# Altium PCB nrf52_linkit.PcbDoc
Units mm, origin at the board's own origin, x right, y up, seen from the top; angles counter-clockwise.
Board outline 51.36 x 26.51 mm, 2 copper layers (Top Layer, Bottom Layer); 24 components, 40 nets, 135 pads, 36 vias.
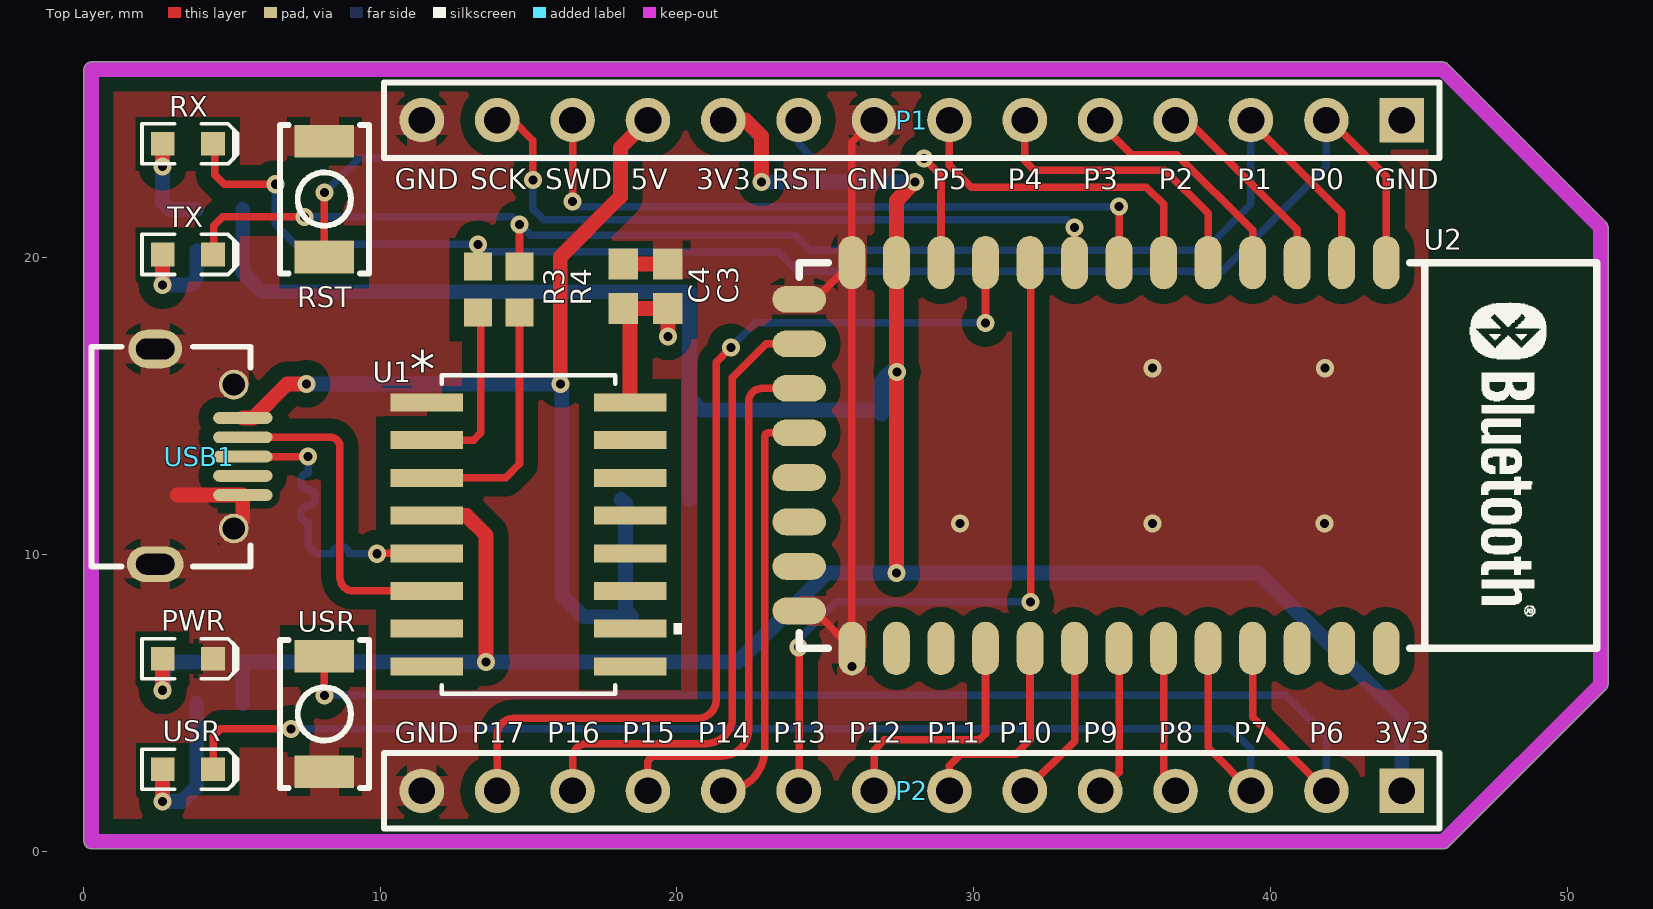
[diagram p0: Top Layer view]
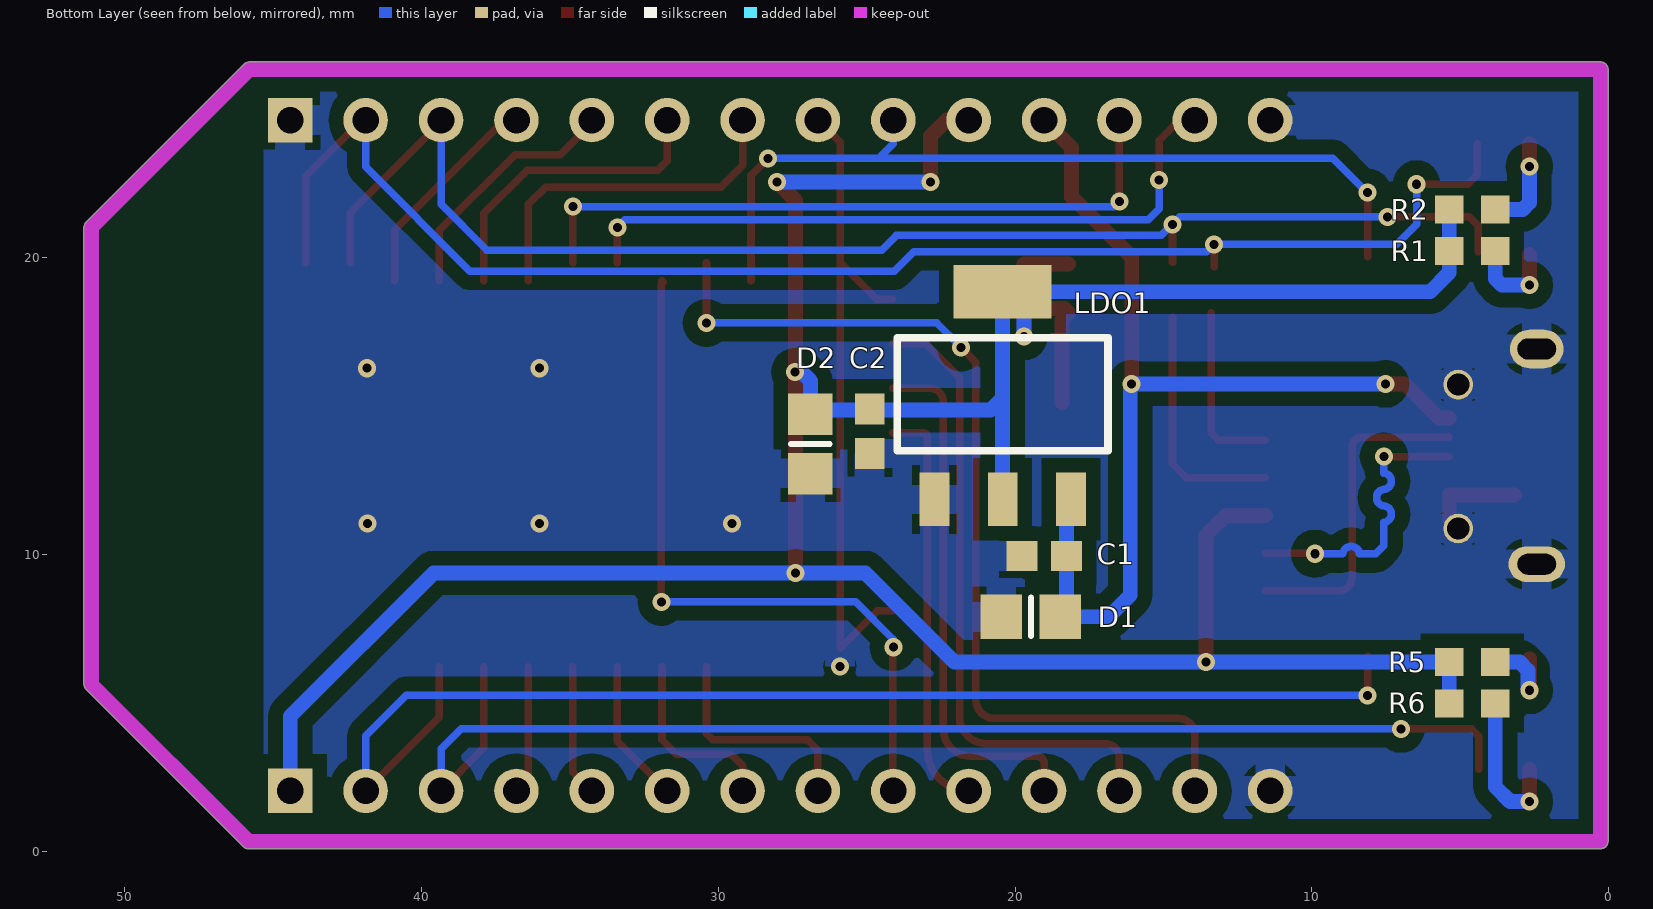
[diagram p1: Bottom Layer view, seen from below]
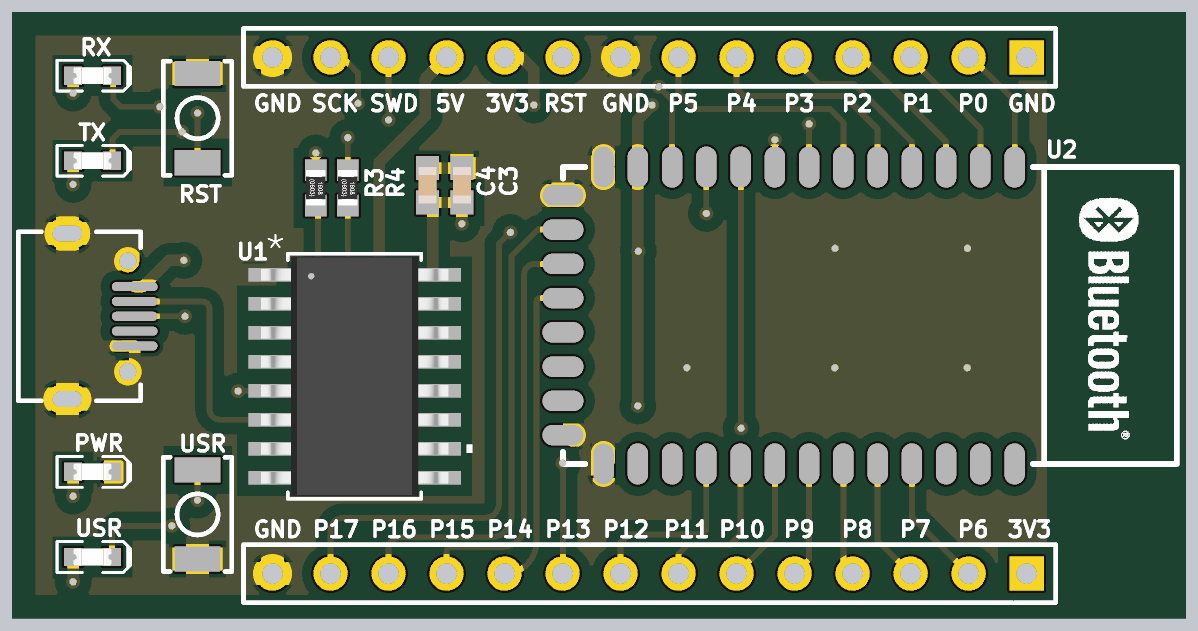
[diagram p2: 3D render of the assembled board from above, using the file's embedded part models]
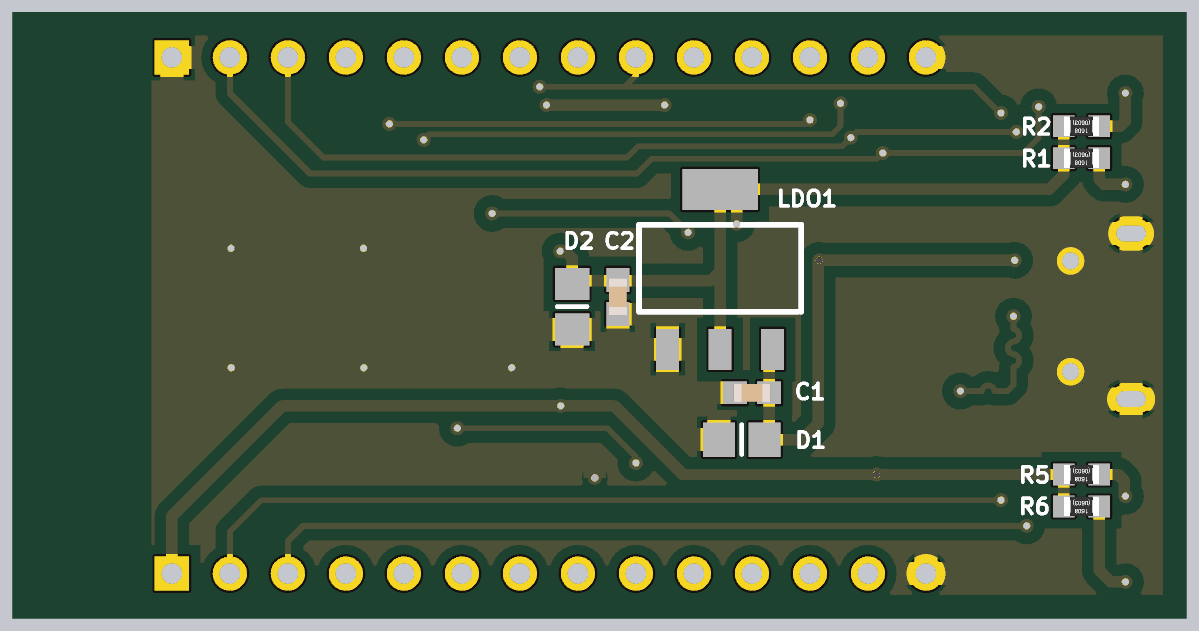
[diagram p3: 3D render of the assembled board from below, using the file's embedded part models]

## Layer stack, top to bottom
Top Solder: solder mask 0.0102, Solder Resist, Dk 3.5
Top Layer: signal copper 0.0356
Dielectric 1: dielectric 0.32, FR-4, Dk 4.8
Bottom Layer: signal copper 0.0356
Bottom Solder: solder mask 0.0102, Solder Resist, Dk 3.5

## Board outline
0.273,0.085 cw(c0.273,0.335) 0.023,0.335 0.023,26.347 cw(c0.273,26.347) 0.273,26.597 45.803,26.597 cw(c45.803,26.347) 45.98,26.524 cw(c45.803,26.347) 45.98,26.524 51.309,21.195 ccw(c51.132,21.018) 51.309,21.196 51.309,21.195 cw(c51.132,21.018) 51.382,21.018 51.382,5.632 cw(c51.132,5.632) 51.309,5.455 cw(c51.132,5.632) 51.309,5.454 51.309,5.455 46.012,0.158 ccw(c45.835,0.335) 46.012,0.158 cw(c45.835,0.335) 45.835,0.085

## Design rules (kind name [scope] priority, off if disabled: settings)
Clearance Clearance_1 [(InNet('GND') AND InPolygon)] p1: gap=0.5
Clearance [All] p2: gap=0.127
PolygonConnect [InNet('GND') vs InNet('GND')] p1: connectstyle=Relief reliefconductorwidth=1 reliefentries=4 polygonreliefangle="90 Angle" airgapwidth=0.254
RoutingVias [All] p1: holewidth=0.711 width=1.27 viastyle="Through Hole" minholewidth=0.711 minwidth=1.27 maxholewidth=0.711 maxwidth=1.27
SolderMaskExpansion [All] p1: expansion=0.102
Width [All] p1: maxlimit=1 minlimit=0.254 preferedwidth=0.5
30 further rules are at their usual default settings.

## Components (designator, comment, footprint, x,y, rotation, side; value= is the part's Value field where it differs from the comment)
C1 "Cap Semi" C0603 19.025,9.95 r180 bottom
C2 "Cap Semi" C0603 24.9,14.15 r90 bottom
C3 "Cap Semi" C0603 19.7,19.035 r270 top
C4 "Cap Semi" C0603 18.2,19.035 r270 top
D1 "Diode" 6-0805_M 19.475,7.9 r180 bottom
D2 "Diode" 6-0805_M 26.9,13.725 r90 bottom
LDO1 "AMS1117" SOT-223 22.723,11.855 r0 bottom
P1 "Header 14" HDR1X14 44.428,24.635 r180 top
P2 "Header 14" HDR1X14 44.428,2.035 r180 top
PWR "LED" 0603 3.525,6.488 r0 top
R1 "Resistors SMD" R0603-M 4.6,20.225 r0 bottom
R2 "Resistors SMD" R0603-M 4.6,21.625 r0 bottom
R3 "Resistors SMD" R0603-M 13.3,18.925 r270 top
R4 "Resistors SMD" R0603-M 14.7,18.925 r270 top
R5 "Resistors SMD" R0603-M 4.6,6.375 r0 bottom
R6 "Resistors SMD" R0603-M 4.6,4.975 r0 bottom
RST "SW-PB" SWITCH_SMD_4x3_DHT-1185 8.125,21.975 r90 top
RX "LED" 0603 3.525,23.838 r0 top
TX "LED" 0603 3.525,20.112 r0 top
U1 "CH340C" SOP16-M 15,10.675 r0 top
U2 "nRF52832" BlueTooth_34_SMD 36.935,13.335 r270 top
USB1 "USB-MICRO" USB-MICRO 2.425,13.3 r270 top
USR "SW-PB" SWITCH_SMD_4x3_DHT-1185 8.125,4.625 r270 top (schematic designator SW1)
USR "LED" 0603 3.525,2.762 r0 top

## Footprints (in the part's own frame and the unit in brackets; to place one, negate y for a bottom-side part, rotate by r counter-clockwise, add the part's x,y. Pads: shape width x height; smd on the part's side, far side on the other; paste and mask are expansions set on the pad)
6-0805_M [mm] "Chip Resistor, Body 2.0x1.2mm, IPC Low Density"
  rect 1.4x1.5 smd: 1(-1,0) 2(1,0)
  silkscreen extent 0,-0.65 0,0.65, body extent -1.07,-0.7 1.07,0.7, height 0.7
0603 [mm]
  round 0.254 on Mech15: 0(0,0)
  rect 0.8x0.8 smd: 1(-0.85,0) 2(0.85,0)
  Top Layer pour cut-out: -0.5,0.5 0.5,0.5 0.5,-0.5 -0.5,-0.5
  silkscreen extent -1.55,-0.67 1.68,0.67, body extent -0.83,-0.36 0.83,0.36, height 0.68
BlueTooth_34_SMD [mm]
  oval 1.8x0.9 smd: 1(-6.5,6.968) 2(-6.5,5.468) 3(-6.5,3.968) 4(-6.5,2.468) 5(-6.5,0.968) 6(-6.5,-0.532) 7(-6.5,-2.032) 8(-6.5,-3.532) 9(-6.5,-5.032) 10(-6.5,-6.532) 11(-6.5,-8.032) 12(-6.5,-9.532) 13(-6.5,-11.032) 22(6.5,-11.032) 23(6.5,-9.532) 24(6.5,-8.032) 25(6.5,-6.532) 26(6.5,-5.032) 27(6.5,-3.532) 28(6.5,-2.032) 29(6.5,-0.532) 30(6.5,0.968) 31(6.5,2.468) 32(6.5,3.968) 33(6.5,5.468) 34(6.5,6.968)
  oval 0.9x1.8 smd: 14(-5.262,-12.81) 15(-3.762,-12.81) 16(-2.262,-12.81) 17(-0.762,-12.81) 18(0.738,-12.81) 19(2.238,-12.81) 20(3.738,-12.81) 21(5.238,-12.81)
  silkscreen extent -6.5,-12.81 6.5,14.07
C0603 [mm] "Chip Capacitor, EIA 0603, IPC-7351 Level B Medium Density"
  round 0.254 on Mech15: 0(0,0)
  rect 1.05x1 smd: 1(-0.75,0) 2(0.75,0)
  Top Layer pour cut-out: -0.2,0.5 0.2,0.5 0.2,-0.5 -0.2,-0.5
  body extent -0.8,-0.4 0.8,0.4, height 0.78
HDR1X14 [mm] "Connector; Header; 14 Position"
  rect 1.5x1.5 hole 0.9: 1(0,0)
  round 1.5 hole 0.9: 2(2.54,0) 3(5.08,0) 4(7.62,0) 5(10.16,0) 6(12.7,0) 7(15.24,0) 8(17.78,0) 9(20.32,0) 10(22.86,0) 11(25.4,0) 12(27.94,0) 13(30.48,0) 14(33.02,0)
  silkscreen extent -1.27,-1.27 34.29,1.27
R0603-M [mm] "Chip Resistor, 2-Leads, Body 1.68x0.88mm, IPC Medium Density"
  rect 0.95x0.95 smd: 1(-0.775,0) 2(0.775,0)
  Top Layer pour cut-out: -0.254,0.675 0.254,0.675 0.254,-0.675 -0.254,-0.675
  body extent -0.77,-0.42 0.78,0.43, height 0.44
SOP16-M [mm]
  rect 2.448x0.608 smd paste+0 mask+0: 1(-3.428,4.445) 2(-3.428,3.175) 3(-3.428,1.905) 4(-3.428,0.635) 5(-3.428,-0.635) 6(-3.428,-1.905) 7(-3.428,-3.175) 8(-3.428,-4.445) 9(3.428,-4.445) 10(3.428,-3.175) 11(3.428,-1.905) 12(3.428,-0.635) 13(3.428,0.635) 14(3.428,1.905) 15(3.428,3.175) 16(3.428,4.445)
  silkscreen extent -2.92,-5.37 5.16,5.37, body extent -4.1,-5.24 4.1,5.25, height 2.01
SOT-223 [mm]
  rect 3.3x1.8 smd: 0(-2.3,-7)
  rect 1x1.8 smd: 1(0,0) 2(-2.3,0) 3(-4.6,0)
  silkscreen extent -5.85,-5.45 1.25,-1.64
SWITCH_SMD_4x3_DHT-1185 [mm]
  rect 1.1x2 smd: 1(-1.95,0) 2(1.95,0)
  silkscreen extent -2.5,-1.5 2.5,1.5
USB-MICRO [mm] "USB方孔"
  oval 1.3x1.8 hole 0.7 slot 1.3 at 90 deg: 0(-3.625,0)
  round 1 hole 0.75: 0(-2.425,2.65) 0(2.425,2.65)
  oval 1.2x1.9 hole 0.7 slot 1.3 at 90 deg: 0(3.625,0)
  oval 0.4x2 smd: 1(-1.3,2.95) 2(-0.65,2.95) 3(0,2.95) 4(0.65,2.95) 5(1.3,2.95)
  silkscreen extent -3.7,-2.15 3.7,3.21

## Part data
C1 C2 C3 C4: "Capacitor (Semiconductor SIM Model)"
D1 D2: "Default Diode"
P1 P2: "Header, 14-Pin"
PWR RX TX USR: "Typical INFRARED GaAs LED"
R1 R2 R3 R4 R5 R6: "Resistor"
RST USR: "按鈕開關"
U1: "No Description Available"

## Via types
v1: diameter 0.61, hole 0.305, Top Layer to Bottom Layer, tented both sides, 36 vias

## Nets (pads, with @x,y where several pads share a name; then routed paths per layer and width w, separated by ;. In a path a pad name is that pad's centre, name@x,y a point inside that pad or via, vN(x,y) a via of type N, cw(c..) or ccw(c..) an arc to the next point about the centre after c; other vN are vias at no path point)
3V3: C2.2 C3.2 C4.2 D2.2 LDO1.0 LDO1.2 P1.10 P2.1 R1.2 R2.2 R5.2 R6.2 U1.4 U1.16 U2.12 | length 114.5
  Top Layer w0.5: U1.4 12.915,11.31 13.575,10.65 v1(13.575,6.375) ; U1.16 18.428,17.917 18.2,18.145 18.34,18.285 C3.2 v1(19.7,17.35) ; P1.10 22.315,24.635 22.85,24.1 v1(22.85,22.55) ; v1@27.403,9.375 U2.12 27.403,21.928 v1(28.025,22.55)
  Bottom Layer w0.5: R6.2 R5.2 v1@13.4,6.375 ; R2.2 5.375,19.5 6.02,18.855 LDO1.0@20.33,18.855 ; v1(13.575,6.375) 22.05,6.375 25.05,9.375 v1(27.4,9.375) 39.6,9.375 44.428,4.547 P2.1 ; v1(19.7,17.35) 19.7,18.225 LDO1.0@20.33,18.855 ; LDO1.2 20.423,15.275 ; v1(22.85,22.55) v1(28.025,22.55) ; D2.2 D2.2@26.9,14.865 ; v1(27.425,16.15) 27.2,16.15 26.9,15.85 D2.2@26.9,14.865 ; LDO1.0@20.33,18.855 LDO1.0 20.423,15.275 ; 20.423,15.275 20.833,14.865 D2.2@26.9,14.865
BGT24_EN: P2.5 U2.28 | length 4.5
  Top Layer w0.254: P2.5 34.903,2.67 U2.28@34.903,6.223
D+: U1.5 USB1.3 | length 10.4
  Top Layer w0.254: USB1.3 v1(7.575,13.3) ; v1(9.9,10.025) 9.915,10.04 U1.5
  Bottom Layer w0.254: v1(7.575,13.3) 7.575,12.746 ccw(c7.603,12.469) 7.575,12.192 cw(c7.547,11.915) 7.575,11.638 ccw(c7.603,11.361) 7.575,11.084 7.575,10.53 7.575,10.3 7.85,10.025 8.404,10.025 cw(c8.681,9.997) 8.958,10.025 9.512,10.025 v1(9.9,10.025)
D-: U1.6 USB1.2 | length 11.1
  Top Layer w0.254: USB1.2@5.4,13.975 USB1.2 8.325,13.95 cw(c8.325,13.625) 8.65,13.625 8.65,9.225 ccw(c9.105,9.225) 9.105,8.77 U1.6
EN: P2.4 U2.29 | length 4.4
  Top Layer w0.254: U2.29@36.403,6.223 36.403,2.44 P2.4
GND: C1.1 C2.1 C3.1 C4.1 D1.1 D2.1 LDO1.1 P1.1 P1.8 P1.14 P2.14 PWR.2 RST.2 U1.1 U2.13 U2.14 U2.21 U2.22 USB1.0 USB1.5 USR.2@8.125,2.675 | length 27.6
  Top Layer w0.254: U2.21 24.641,8.097 U2.22 U2.13 ; U2.14 24.665,18.597 U2.13 ; P1.8 25.903,23.89 U2.13
  Top Layer w0.5: 3.175,12 USB1.5 5.375,11.175 USB1.0@5.075,10.875 ; C4.1 C3.1
  other v1: 25.908,6.225 29.55,11.05 36.025,11.05 41.825,11.05 36.037,16.276 41.837,16.276
I_CW: P2.10 U2.17 | length 14
  Top Layer w0.254: P2.10 ccw(c21.568,3.435) 22.968,3.435 22.968,13.968 cw(c23.097,13.968) 23.097,14.097 U2.17
I_HIGHGAIN: P2.13 U2.10 | length 33
  Top Layer w0.254: P2.13 13.948,3.923 cw(c14.5,3.923) 14.5,4.475 20.7,4.475 ccw(c20.7,5.1) 21.325,5.1 21.325,16.475 v1(21.825,16.975) ; v1(30.403,17.803) U2.10
  Bottom Layer w0.254: v1(21.825,16.975) 22.653,17.803 v1(30.403,17.803)
MUXOUT: P1.4 U2.3 | length 7.2
  Top Layer w0.254: P1.4@37.012,24.839 40.903,20.947 U2.3@40.903,19.223
NetPWR_1: PWR.1 R5.1 | length 3
  Top Layer w0.5: v1(2.675,5.425) PWR.1
  Bottom Layer w0.5: v1(2.675,5.425) 2.725,5.475 2.725,6.1 3,6.375 R5.1
NetR1_1: R1.1 TX.1 | length 3.2
  Top Layer w0.5: v1(2.675,19.075) TX.1
  Bottom Layer w0.5: v1@2.7,19.075 3.601,19.075 3.825,19.299 R1.1
NetR2_1: R2.1 RX.1 | length 3.2
  Top Layer w0.5: v1(2.675,23.075) RX.1
  Bottom Layer w0.5: v1(2.675,23.075) 2.675,21.85 2.9,21.625 R2.1
NetR6_1: R6.1 USR.1@2.675,2.762 | length 5.2
  Top Layer w0.5: v1(2.675,1.675) USR.1@2.675,2.762
  Bottom Layer w0.5: v1(2.675,1.675) 3.325,1.675 3.825,2.175 R6.1
P0: P1.2 R3.1 RX.2 U2.1 | length 50.2
  Top Layer w0.254: RX.2@4.434,23.838 4.434,22.791 4.75,22.475 v1(6.475,22.475) ; R3.1 v1(13.3,20.45) ; P1.2@41.838,24.584 42.066,24.584 43.903,22.747 U2.1
  Bottom Layer w0.254: v1(6.475,22.475) 6.475,21.125 7.15,20.45 v1(13.3,20.45) 13.55,20.2 23.425,20.2 24.075,19.55 38.375,19.55 41.888,23.063 P1.2
P0.06: U2.18
P0.07: U2.19
P0.08: U2.20
P0.09: U2.23
P0.10: U2.24
P0.18: U2.32
P0.19: U2.33
P0.20: U2.34
P1: P1.3 R4.1 TX.2 U2.2 | length 47.3
  Top Layer w0.254: TX.2@4.4,20.2 4.4,21.075 4.7,21.375 v1(7.45,21.375) ; R4.1@14.7,19.85 v1(14.7,21.125) ; P1.3@39.424,24.712 39.424,24.501 42.403,21.522 U2.2
  Bottom Layer w0.254: v1(7.45,21.375) 14.45,21.375 v1(14.7,21.125) 15.075,20.75 24,20.75 24.5,20.25 37.8,20.25 39.348,21.798 P1.3
P3: P1.5 U2.4 | length 8.4
  Top Layer w0.254: P1.5@34.218,24.585 35.327,23.475 36.851,23.475 39.403,20.923 U2.4@39.403,19.223
P4: P1.6 U2.5 | length 10.6
  Top Layer w0.254: P1.6 31.728,23.264 32.042,22.95 36.45,22.95 37.903,21.497 U2.5@37.903,19.223
P5: P1.7 U2.6 | length 11.9
  Top Layer w0.254: P1.7 29.188,23.112 29.925,22.375 35.825,22.375 36.403,21.797 U2.6@36.403,19.223
P6: P2.2 U2.31 USR.1@8.125,6.575 | length 42.7
  Top Layer w0.254: v1(8.125,5.25) USR.1@8.125,6.575 ; U2.31@39.403,6.223 39.403,4.52 P2.2
  Bottom Layer w0.254: v1(8.125,5.25) 40.525,5.25 41.888,3.887 P2.2
P7: P2.3 U2.30 USR.2@4.375,2.762 | length 42.7
  Top Layer w0.254: USR.2@4.375,2.762 4.375,3.875 4.625,4.125 v1(7,4.125) ; U2.30@37.903,6.223 37.903,3.48 P2.3
  Bottom Layer w0.254: v1(7,4.125) 38.675,4.125 39.348,3.452 P2.3
P10: P2.6 U2.27 | length 4.9
  Top Layer w0.254: P2.6 33.403,3.71 U2.27@33.403,6.223
P11: P2.7 U2.26 | length 6.4
  Top Layer w0.254: P2.7 29.188,2.888 29.575,3.275 31.425,3.275 31.903,3.753 U2.26@31.903,6.223
P12: P2.8 U2.25 | length 7.6
  Top Layer w0.254: P2.8 26.648,3.398 27,3.75 30.2,3.75 30.403,3.953 U2.25@30.403,6.223
P13: P2.9 U2.9 | length 24.3
  Top Layer w0.254: P2.9@24.125,2.035 v1@24.125,6.875 ; U2.9@31.903,19.223 31.855,19.175 31.93,19.1 31.925,19.094 v1(31.925,8.4)
  Bottom Layer w0.254: v1(24.108,6.875) 24.108,7.135 25.373,8.4 v1(31.925,8.4)
P15: P2.11 U2.16 | length 18
  Top Layer w0.254: P2.11 19.028,2.978 cw(c19.25,2.978) 19.25,3.2 21.5,3.2 ccw(c21.5,4.125) 22.425,4.125 22.425,15.15 cw(c22.872,15.15) 22.872,15.597 U2.16
P16: P2.12 U2.15 | length 21.4
  Top Layer w0.254: P2.12 16.488,3.138 cw(c16.975,3.138) 16.975,3.625 20.975,3.625 ccw(c20.975,4.525) 21.875,4.525 21.875,15.951 23.021,17.097 U2.15
RST: P1.9 RST.1 U2.11 | length 28.7
  Top Layer w0.254: RST.1 v1(8.125,22.2) ; v1(28.325,23.35) 28.903,22.772 U2.11@28.903,19.223
  Bottom Layer w0.254: v1@8.138,22.187 9.3,23.35 24.6,23.35 ; P1.9 24.108,23.842 24.6,23.35 ; v1(28.325,23.35) 24.6,23.35
RX_CH340: R4.2 U1.3 | length 8.3
  Top Layer w0.254: U1.3 14.23,12.58 14.7,13.05 R4.2@14.7,18
SW_DCLK: P1.13 U2.8 | length 23.5
  Top Layer w0.254: P1.13 14.465,24.635 15.15,23.95 v1(15.15,22.625) ; U2.8 v1(33.403,21.025)
  Bottom Layer w0.254: v1(15.15,22.625) 15.15,21.65 15.525,21.275 33.153,21.275 v1(33.403,21.025)
SW_DIO: P1.12 U2.7 | length 23.1
  Top Layer w0.254: v1(16.488,21.9) P1.12 ; U2.7 v1(34.903,21.725)
  Bottom Layer w0.254: v1(16.488,21.9) 16.663,21.725 v1(34.903,21.725)
TX_CH340: R3.2 U1.2 | length 6
  Top Layer w0.254: U1.2 13.15,13.85 13.4,14.1 R3.2@13.4,18.15
V_USB: C1.2 D1.2 LDO1.3 P1.11 USB1.1 | length 35.2
  Top Layer w0.5: USB1.1 5.725,14.6 6.875,15.75 v1(7.525,15.75) ; v1(16.075,15.75) 16.075,20.025 18.1,22.05 18.1,23.707 P1.11
  Bottom Layer w0.5: v1(7.525,15.75) 16.125,15.75 16.125,8.625 16.85,7.9 D1.2 18.275,8.1 C1.2 18.275,11.703 LDO1.3
pads on no net: C1.0 C2.0 C3.0 C4.0 PWR.0 RX.0 TX.0 U1.7 U1.8 U1.9 U1.10 U1.11 U1.12 U1.13 U1.14 U1.15 USB1.4 USR.0

## Polygon pours and split planes (outlines as drawn)
GND on Top Layer "Bottom Layer-No Net" (solid, remove dead copper, pour order 2): -3.5,30.612 -3.5,-3.175 45.325,-3.175 45.325,30.529
GND on Bottom Layer "Bottom Layer-No Net" (solid, remove dead copper, pour order 0): -9.85,30.28 -9.85,0.45 45.325,0.45 45.325,30.186

## Keep-outs
Keep-Out Layer:
  lines w0.5: 0.273,0.335 0.273,26.347 45.803,26.347 51.132,21.018 51.132,5.632 45.835,0.335 0.273,0.335

## Other copper
Top Layer:
  pour cut-out: 45.525,5.877 50.958,5.877 50.993,5.842 50.993,20.828 45.532,20.828
Bottom Layer:
  pour cut-out: 45.525,5.877 50.958,5.877 50.993,5.842 50.993,20.828 45.532,20.828

## Silkscreen, mask and mechanical layers (free items; w line width, h text height)
Top Overlay:
  text "GND" at 10.494,22.3 h0.69
  text "SCK" at 13.034,22.3 h0.69
  text "SWD" at 15.574,22.3 h0.69
  text "5V" at 18.457,22.3 h0.69
  text "3V3" at 20.654,22.3 h0.69
  text "RST" at 23.194,22.3 h0.69
  text "GND" at 25.734,22.3 h0.69
  text "P5" at 28.617,22.3 h0.69
  text "P4" at 31.157,22.3 h0.69
  text "P3" at 33.697,22.3 h0.69
  text "P2" at 36.237,22.3 h0.69
  text "P1" at 38.891,22.3 h0.69
  text "P0" at 41.317,22.3 h0.69
  text "GND" at 43.514,22.3 h0.69
  text "GND" at 10.494,3.65 h0.69
  text "P17" at 13.091,3.65 h0.69
  text "P16" at 15.631,3.65 h0.69
  text "P15" at 18.171,3.65 h0.69
  text "P14" at 20.711,3.65 h0.69
  text "P13" at 23.251,3.65 h0.69
  text "P12" at 25.791,3.65 h0.69
  text "P11" at 28.445,3.65 h0.69
  text "P10" at 30.871,3.65 h0.69
  text "P9" at 33.697,3.65 h0.69
  text "P8" at 36.237,3.65 h0.69
  text "P7" at 38.777,3.65 h0.69
  text "P6" at 41.317,3.65 h0.69
  text "3V3" at 43.514,3.65 h0.69

## Text inside footprints (layer, text, board x,y; h text height)
U1: Top Overlay "*" at 11,15.601 h1.27; Mechanical 13 "*" at 12.27,14.574 h1.27